# Altium PCB acs712Connect.PcbDoc
Units mm, origin at the board's own origin, x right, y up, seen from the top; angles counter-clockwise.
Board outline 152.4 x 101.6 mm, 2 copper layers (Top Layer, Bottom Layer); 21 components, 2 nets, 44 pads, 0 vias.
Unrouted connection lines stored in the file: 2.
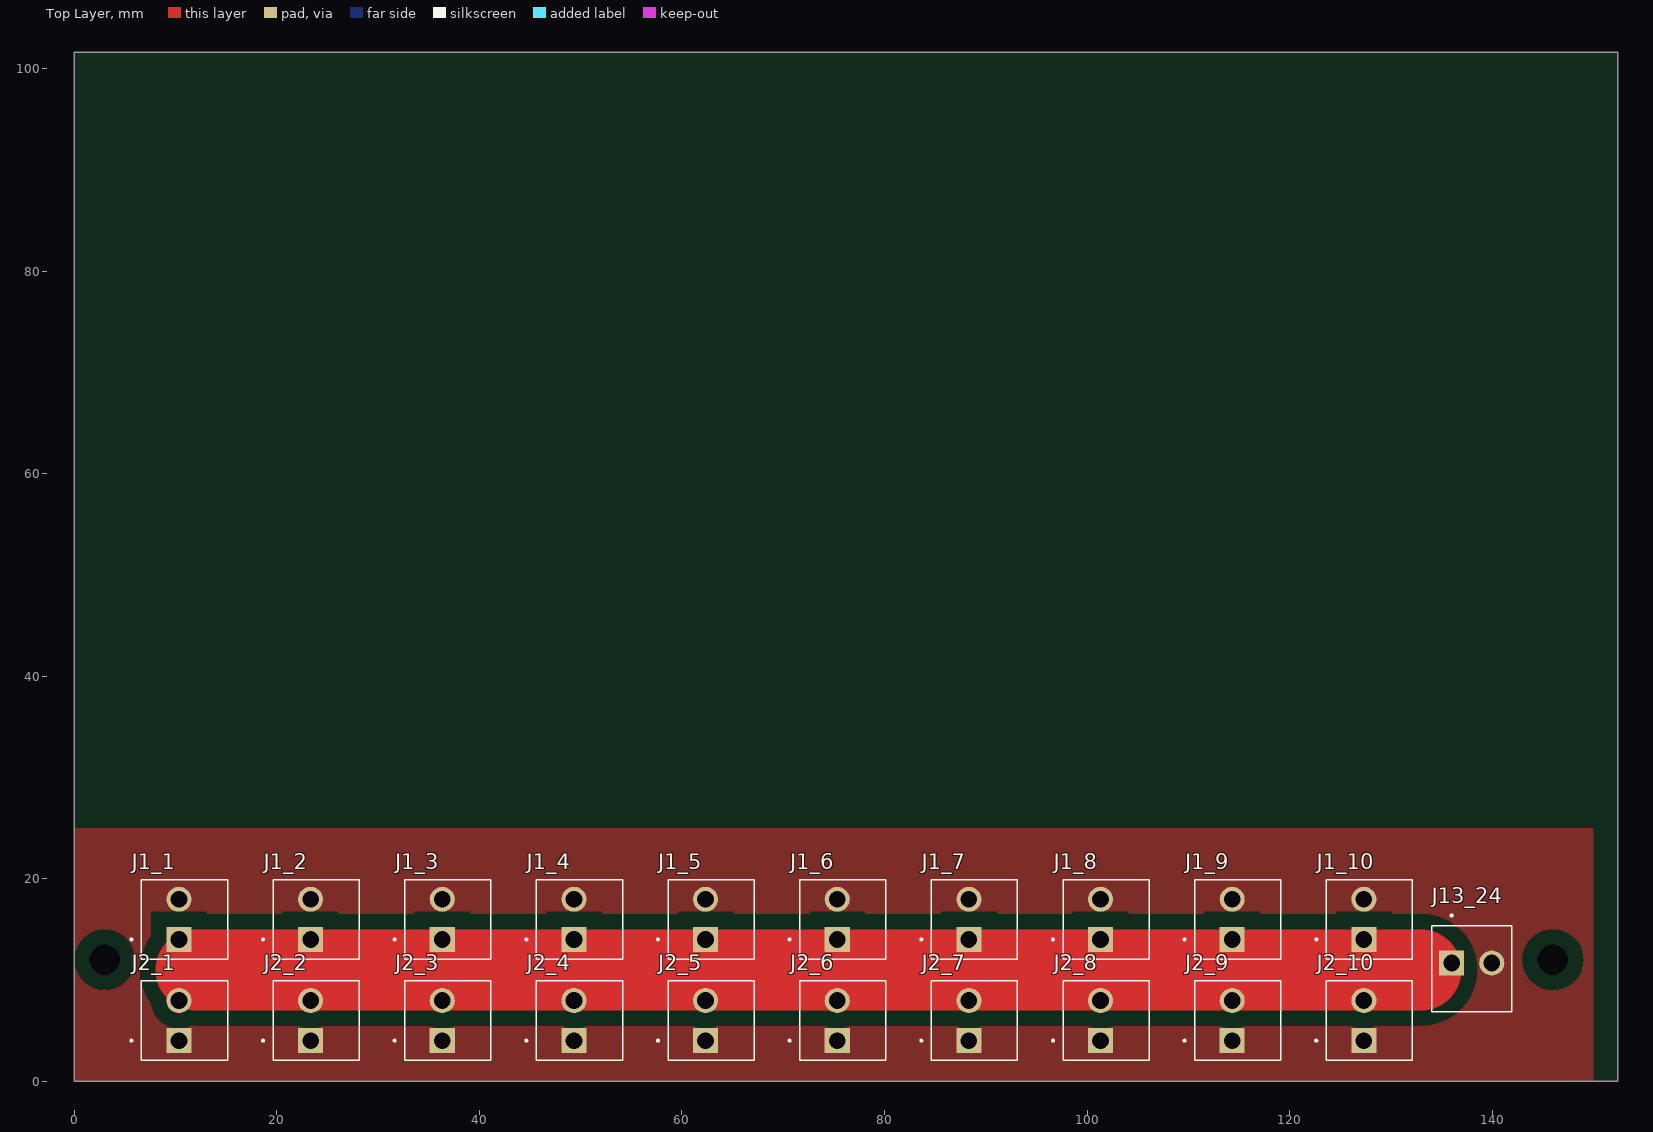
[diagram p0: Top Layer view]
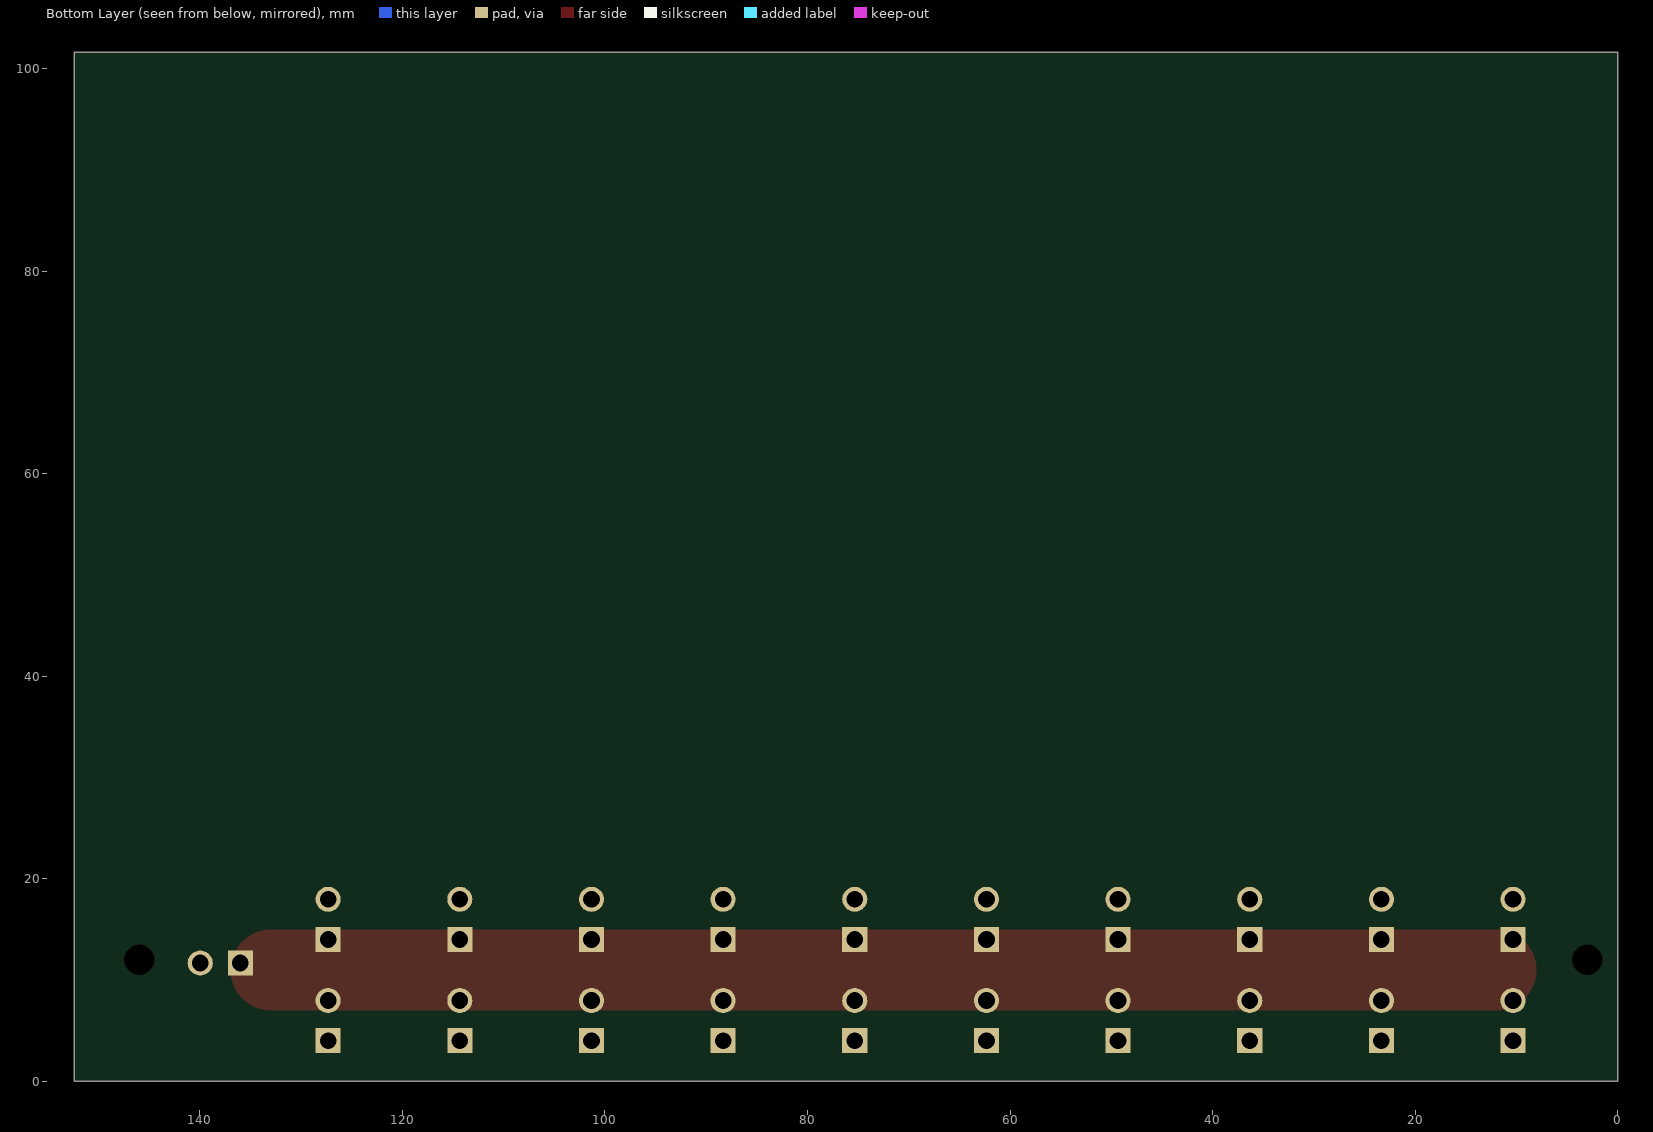
[diagram p1: Bottom Layer view, seen from below]

## Layer stack, top to bottom
Top Solder: solder mask 0.0102, Solder Resist, Dk 3.5
Top Layer: signal copper 0.0356
Dielectric 1: dielectric 0.32, FR-4, Dk 4.8
Bottom Layer: signal copper 0.0356
Bottom Solder: solder mask 0.0102, Solder Resist, Dk 3.5

## Board outline
0,0 152.4,0 152.4,101.6 0,101.6

## Design rules (kind name [scope] priority, off if disabled: settings)
Clearance [All] p1: gap=1.5 ignorepadtopadclearanceinfootprint=FALSE
PolygonConnect [All] p1: connectstyle=Direct reliefconductorwidth=0.254 reliefentries=4 polygonreliefangle="90 Angle" airgapwidth=0.254
RoutingVias [All] p1: holewidth=0.711 width=1.27 viastyle="Through Hole" minholewidth=0.711 minwidth=1.27 maxholewidth=0.711 maxwidth=1.27
SolderMaskExpansion [All] p1: expansion=0.102
Width [All] p1: maxlimit=0.254 minlimit=0.254 preferedwidth=0.254
30 further rules are at their usual default settings.

## Components (designator, comment, footprint, x,y, rotation, side; value= is the part's Value field where it differs from the comment)
J1_1 "ACS712Measure" *TE_6-1123723-2 10.334,15.985 r90 top (schematic designator J11)
J1_2 "ACS712Measure" *TE_6-1123723-2 23.334,15.985 r90 top (schematic designator J11)
J1_3 "ACS712Measure" *TE_6-1123723-2 36.334,15.985 r90 top (schematic designator J11)
J1_4 "ACS712Measure" *TE_6-1123723-2 49.334,15.985 r90 top (schematic designator J11)
J1_5 "ACS712Measure" *TE_6-1123723-2 62.334,15.985 r90 top (schematic designator J11)
J1_6 "ACS712Measure" *TE_6-1123723-2 75.334,15.985 r90 top (schematic designator J11)
J1_7 "ACS712Measure" *TE_6-1123723-2 88.334,15.985 r90 top (schematic designator J11)
J1_8 "ACS712Measure" *TE_6-1123723-2 101.334,15.985 r90 top (schematic designator J11)
J1_9 "ACS712Measure" *TE_6-1123723-2 114.334,15.985 r90 top (schematic designator J11)
J1_10 "ACS712Measure" *TE_6-1123723-2 127.334,15.985 r90 top (schematic designator J11)
J2_1 "ACS712Measure" *TE_6-1123723-2 10.334,5.985 r90 top (schematic designator J11)
J2_2 "ACS712Measure" *TE_6-1123723-2 23.334,5.985 r90 top (schematic designator J11)
J2_3 "ACS712Measure" *TE_6-1123723-2 36.334,5.985 r90 top (schematic designator J11)
J2_4 "ACS712Measure" *TE_6-1123723-2 49.334,5.985 r90 top (schematic designator J11)
J2_5 "ACS712Measure" *TE_6-1123723-2 62.334,5.985 r90 top (schematic designator J11)
J2_6 "ACS712Measure" *TE_6-1123723-2 75.334,5.985 r90 top (schematic designator J11)
J2_7 "ACS712Measure" *TE_6-1123723-2 88.334,5.985 r90 top (schematic designator J11)
J2_8 "ACS712Measure" *TE_6-1123723-2 101.334,5.985 r90 top (schematic designator J11)
J2_9 "ACS712Measure" *TE_6-1123723-2 114.334,5.985 r90 top (schematic designator J11)
J2_10 "ACS712Measure" *TE_6-1123723-2 127.334,5.985 r90 top (schematic designator J11)
J13_24 "ACS712Measure" *TE_6-1123723-2 137.985,11.666 r0 top (schematic designator J11)

## Footprints (in the part's own frame and the unit in brackets; to place one, negate y for a bottom-side part, rotate by r counter-clockwise, add the part's x,y. Pads: shape width x height; smd on the part's side, far side on the other; paste and mask are expansions set on the pad)
*TE_6-1123723-2 [mm]
  rect 2.475x2.475 hole 1.65: 1(-1.98,0)
  round 2.475 hole 1.65: 2(1.98,0)
  silkscreen extent -3.93,-4.8 3.93,4.8

## Part data
J1_1 J1_2 J1_3 J1_4 J1_5 J1_6 J1_7 J1_8 J1_9 J1_10 J2_1 J2_2 J2_3 J2_4 J2_5 J2_6 J2_7 J2_8 J2_9 J2_10 J13_24: library part 6-1123723-2, "3.96 EP HDR ASSY 2P_GREEN_", Package=None, Availability=Unavailable, Centerline_Pitch="3.96 mm[.156 in]", EU_RoHS_Compliance=Compliant, MF="TE Connectivity", MP=6-1123723-2, Number_of_Positions=2, Price=None, Product_Type=Header, SnapEDA_Link=https://www.snapeda.com/parts/6-1123723-2/TE%20Connectivity%20AMP%20Connectors/view-part/?ref=snap, TE_purchase_URL=https://www.te.com/usa-en/product-6-1123723-2.html?te_bu=Cor&te_type=disp&te_campaign=seda_glo_cor-seda-global-disp-prtnr-fy19-seda-model-bom-cta_sma-317_1&elqCampaignId=32493

## Free pads (board coordinates)
  round 1.524 hole 3: 25(146,12) 26(3,12)

## Nets (pads, with @x,y where several pads share a name; then routed paths per layer and width w, separated by ;. In a path a pad name is that pad's centre, name@x,y a point inside that pad or via, vN(x,y) a via of type N, cw(c..) or ccw(c..) an arc to the next point about the centre after c; other vN are vias at no path point)
IN: J1_1.1 J2_1.2
OUT: J1_1.2 J1_2.2 J1_3.2 J1_4.2 J1_5.2 J1_6.2 J1_7.2 J1_8.2 J1_9.2 J1_10.2 J2_1.1 J2_2.1 J2_3.1 J2_4.1 J2_5.1 J2_6.1 J2_7.1 J2_8.1 J2_9.1 J2_10.1 J13_24.1 J13_24.2
pads on no net: J1_2.1 J1_3.1 J1_4.1 J1_5.1 J1_6.1 J1_7.1 J1_8.1 J1_9.1 J1_10.1 J2_2.2 J2_3.2 J2_4.2 J2_5.2 J2_6.2 J2_7.2 J2_8.2 J2_9.2 J2_10.2
copper on no net: | length 121
  Top Layer w8: 12,11 133,11

## Polygon pours and split planes (outlines as drawn)
OUT on Top Layer "Top Layer-OUT" (solid, remove dead copper, pour order 0): 0,0 150,0 150,25 0,25